# Altium PCB pcb-initial-failure.PcbDoc
Units mm, origin at the board's own origin, x right, y up, seen from the top; angles counter-clockwise.
Board outline 19.6 x 17.6 mm, 2 copper layers (F.Cu, B.Cu); 2 components, 9 nets, 95 pads, 15 vias.
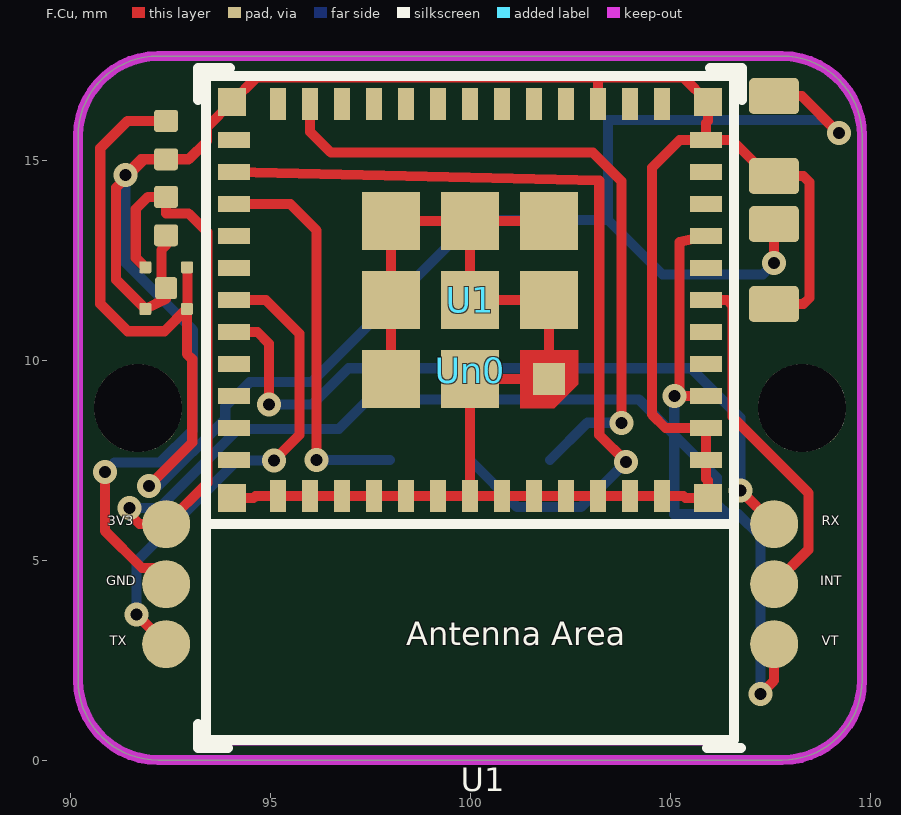
[diagram p0: F.Cu view]
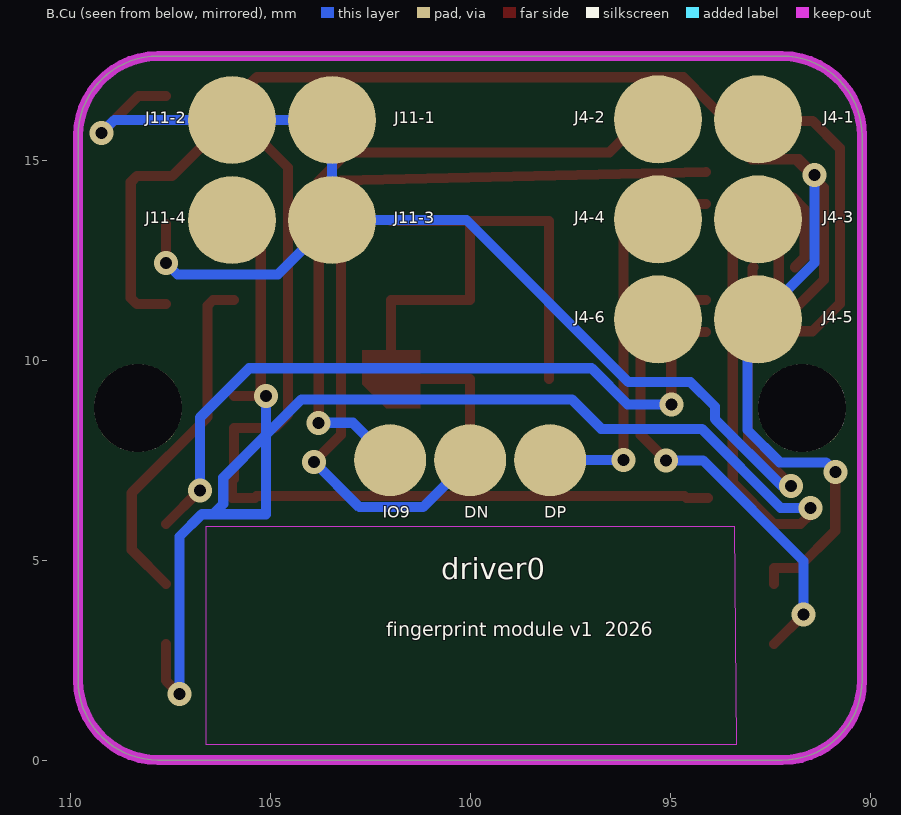
[diagram p1: B.Cu view, seen from below]

## Layer stack, top to bottom
F.Mask: solder mask 0.0102, Solder Resist, Dk 3.5
F.Cu: signal copper 0.0356
Dielectric 1: dielectric 0.32, FR-4, Dk 4.8
B.Cu: signal copper 0.0356
B.Mask: solder mask 0.0102, Solder Resist, Dk 3.5

## Board outline
92.2,17.6 107.8,17.6 cw(c107.799,15.599) 109.8,15.6 109.8,2 cw(c107.799,2.001) 107.8,0 92.2,0 cw(c92.201,2.001) 90.2,2 90.2,15.6 cw(c92.201,15.599) 92.2,17.6

## Design rules (kind name [scope] priority, off if disabled: settings)
Clearance "Clearence 0.2_NetClass" [InNetClass('Default')] p1: gap=0.127 ignorepadtopadclearanceinfootprint=FALSE
MinimumSolderMaskSliver [All] p1: minsoldermaskwidth=0
PolygonConnect [All] p1: connectstyle=Direct reliefconductorwidth=0.254 reliefentries=4 polygonreliefangle="90 Angle" airgapwidth=0.254
RoutingVias [All] p1: holewidth=0.3 width=0.6 viastyle="Through Hole" minholewidth=0.3 minwidth=0.5 maxholewidth=0.4 maxwidth=0.8
SilkToSilkClearance [All] p1: silktosilkclearance=0
SilkToSolderMaskClearance [IsPad] p1: minsilkscreentomaskgap=0 clearancetoexposedcopper=TRUE
SolderMaskExpansion [All] p1: expansion=0 istentingtop=FALSE
Width Width_Power [InNet('VBAT') Or InNet('GND') Or InNet('+3V3')] p1: maxlimit=0.6 minlimit=0.254 preferedwidth=0.254 minimp=50.000000 maximp=50.000000 favimp=50.000000
Width [All] p2: maxlimit=0.254 minlimit=0.254 preferedwidth=0.254
27 further rules are at their usual default settings.

## Classes and differential pairs
net class Default: +3V3 BOOT_IO9 FP_INT FP_RX FP_TX GND USB_DN USB_DP VBAT

## Components (designator, comment, footprint, x,y, rotation, side; value= is the part's Value field where it differs from the comment)
U1 "ESP32-C3-MINI-1" ESP32-C3-MINI-1 100,8.8 r180 top
Un0 "Comment" touchid_board 100,8.8 r0 top value=touchid_v1

## Footprints (in the part's own frame and the unit in brackets; to place one, negate y for a bottom-side part, rotate by r counter-clockwise, add the part's x,y. Pads: shape width x height; smd on the part's side, far side on the other; paste and mask are expansions set on the pad)
ESP32-C3-MINI-1 [mm]
  rect 0.8x0.4 smd mask+0: 1(-5.9,1.3) 2(-5.9,0.5) 3(-5.9,-0.3) 4(-5.9,-1.1) 5(-5.9,-1.9) 6(-5.9,-2.7) 7(-5.9,-3.5) 8(-5.9,-4.3) 9(-5.9,-5.1) 10(-5.9,-5.9) 11(-5.9,-6.7) 25(5.9,-6.7) 26(5.9,-5.9) 27(5.9,-5.1) 28(5.9,-4.3) 29(5.9,-3.5) 30(5.9,-2.7) 31(5.9,-1.9) 32(5.9,-1.1) 33(5.9,-0.3) 34(5.9,0.5) 35(5.9,1.3)
  rect 0.4x0.8 smd mask+0: 12(-4.8,-7.6) 13(-4,-7.6) 14(-3.2,-7.6) 15(-2.4,-7.6) 16(-1.6,-7.6) 17(-0.8,-7.6) 18(0,-7.6) 19(0.8,-7.6) 20(1.6,-7.6) 21(2.4,-7.6) 22(3.2,-7.6) 23(4,-7.6) 24(4.8,-7.6) 36(4.8,2.2) 37(4,2.2) 38(3.2,2.2) 39(2.4,2.2) 40(1.6,2.2) 41(0.8,2.2) 42(0,2.2) 43(-0.8,2.2) 44(-1.6,2.2) 45(-2.4,2.2) 46(-3.2,2.2) 47(-4,2.2) 48(-4.8,2.2)
  rect 0.8x0.8 smd mask+0: 49(-1.975,-0.725)
  rect 1.45x1.45 smd mask+0: 49(-1.975,-2.7) 49(-1.975,-4.675) 49(0,-0.725) 49(0,-2.7) 49(0,-4.675) 49(1.975,-0.725) 49(1.975,-2.7) 49(1.975,-4.675)
  rect 0.7x0.7 smd mask+0: 50(5.95,2.25) 51(5.95,-7.65) 52(-5.95,-7.65) 53(-5.95,2.25)
  F.Cu region: -1.25,-1.45 -2.7,-1.45 -2.7,-0.6 -2.1,0 -1.25,0
  silkscreen extent -6.8,-8.5 6.8,8.5
touchid_board [mm]
  rrect25% 0.6x0.55 smd mask+0: C1-1(-7.6,5.28) C1-2(-7.6,4.32) C2-1(-7.6,7.18) C2-2(-7.6,6.22)
  rrect25% 1.25x0.9 smd mask+0: C3-1(7.6,4.6) C3-2(7.6,2.6) C4-1(7.6,7.8) C4-2(7.6,5.8)
  round 1.2 smd mask+0: J2-1(-7.6,-2.9) J2-2(-7.6,-4.4) J2-3(-7.6,-5.9) J2-4(7.6,-2.9) J2-5(7.6,-4.4) J2-6(7.6,-5.9)
  round 2.2 smd far side paste-2.2 mask+0: J4-1(-7.2,7.22) J4-2(-4.7,7.22) J4-3(-7.2,4.72) J4-4(-4.7,4.72) J4-5(-7.2,2.22) J4-6(-4.7,2.22) J11-1(3.45,7.2) J11-2(5.95,7.2) J11-3(3.45,4.7) J11-4(5.95,4.7)
  round 1.8 smd far side paste-1.8 mask+0: TP-DN(0,-1.3) TP-DP(-2,-1.3) TP-IO9(2,-1.3)
  rrect25% 0.3x0.3 smd mask+0: U2-1(-8.12,3.52) U2-2(-8.12,2.48) U2-3(-7.08,2.48) U2-4(-7.08,3.52)
  rrect25% 0.55x0.55 smd mask+0: U2-5(-7.6,3)
  round 2.2 hole 2.2 paste-2539.97 mask+0: Un1(8.3,0) Un2(-8.3,0)

## Part data
U1: "ESP32-C3-MINI-1: https://www.espressif.com/sites/default/files/documentation/esp32-c3-mini-1_datasheet_en.pdf"
Un0: library part touchid_board, "TouchID module board: F.Cu=components (cavity side), B.Cu=pogo pads (module bottom). Nets: VBAT from J11-1/2/3, GND J4-5, 3V3 via U2 LDO. Ratsnest shows required connections - routing TBD."

## Via types
v1: diameter 0.6, hole 0.3, F.Cu to B.Cu, 15 vias

## Nets (pads, with @x,y where several pads share a name; then routed paths per layer and width w, separated by ;. In a path a pad name is that pad's centre, name@x,y a point inside that pad or via, vN(x,y) a via of type N, cw(c..) or ccw(c..) an arc to the next point about the centre after c; other vN are vias at no path point)
+3V3: U1.3 U1.8 Un0.C1-1 Un0.J2-1 Un0.J2-6 Un0.U2-1 | length 46.6
  F.Cu w0.254: v1(91.491,6.304) 91.491,6.147 91.738,5.9 Un0.J2-1 93.435,6.935 93.435,13.194 92.964,13.665 92.4,13.665 Un0.C1-1 91.948,14.08 91.643,13.775 91.643,12.557 Un0.U2-1 ; v1(105.105,9.1) v1@105.232,9.1 ; U1.3 v1@105.232,9.1 ; U1.8 105.232,12.954 v1@105.232,9.1 ; v1(107.264,1.651) 107.6,1.987 Un0.J2-6
  B.Cu w0.254: v1(91.491,6.304) 92.232,6.304 94.209,8.28 96.723,8.28 97.46,9.017 104.216,9.017 105.105,8.128 ; v1(105.105,9.1) 105.105,8.128 ; v1(107.264,1.651) 107.264,5.588 106.705,6.147 106.426,6.147 ; 105.105,8.128 105.105,6.147 106.426,6.147 ; 105.105,8.128 106.172,7.061 106.172,6.401 106.426,6.147
BOOT_IO9: U1.23 Un0.TP-IO9 | length 17.2
  F.Cu w0.254: U1.23 96,15.709 96.52,15.189 103.066,15.189 103.784,14.47 v1(103.784,8.433)
  B.Cu w0.254: Un0.TP-IO9 102.933,8.433 v1(103.784,8.433)
FP_INT: U1.6 Un0.J2-5 | length 8.8
  F.Cu w0.254: U1.6 106.426,11.5 106.565,11.361 106.565,8.573 108.458,6.68 108.458,5.258 Un0.J2-5
FP_RX: U1.31 Un0.J2-4 | length 18.2
  F.Cu w0.254: U1.31 94.685,10.7 94.971,10.414 v1(94.971,8.89) ; v1(106.756,6.744) Un0.J2-4
  B.Cu w0.254: v1(94.971,8.89) 96.057,8.89 96.962,9.794 105.522,9.794 106.756,8.56 v1(106.756,6.744)
FP_TX: U1.30 Un0.J2-3 | length 12.3
  F.Cu w0.254: v1(91.664,3.636) Un0.J2-3 ; U1.30 94.894,11.5 95.737,10.657 95.737,8.133 v1(95.098,7.493)
  B.Cu w0.254: v1(91.664,3.636) 91.664,4.978 94.178,7.493 v1(95.098,7.493)
GND: U1.1 U1.2 U1.11 U1.14 U1.36 U1.37 U1.38 U1.39 U1.40 U1.41 U1.42 U1.43 U1.44 U1.45 U1.46 U1.47 U1.48 U1.49 U1.50 U1.51 U1.52 U1.53 Un0.C1-2 Un0.C2-2 Un0.C3-2 Un0.C4-2 Un0.J2-2 Un0.J4-5 Un0.U2-2 Un0.U2-5 | length 86.4
  F.Cu w0.254: v1(90.87,7.202) 90.87,5.731 91.8,4.801 92.4,4.801 Un0.J2-2 ; v1(91.389,14.63) 91.779,15.02 91.855,15.02 ; Un0.C1-2 92.4,12.871 92.284,12.755 92.284,11.916 Un0.U2-5 92.4,11.532 Un0.U2-2 91.703,11.457 91.151,12.009 91.151,14.316 91.427,14.592 91.855,15.02 ; U1.50 94.59,6.55 94.64,6.6 U1.36 U1.37 U1.38 U1.39 U1.40 U1.41 U1.42 ; U1.49@98.025,9.525 98.025,11.5 98.025,13.475 U1.49@100,13.475 ; U1.49@101.975,13.475 U1.49@100,13.475 ; U1.14 103.2,17.069 ; Un0.C3-2 108.331,11.4 108.483,11.552 108.483,14.448 108.331,14.6 Un0.C4-2 107.448,14.6 106.548,15.5 U1.11 ; 91.855,15.02 Un0.C2-2 92.964,15.02 93.421,15.477 93.421,15.821 U1.51 94.669,17.069 103.2,17.069 ; U1.42 U1.43 U1.44 U1.45 U1.46 U1.47 U1.48 105.334,6.6 105.384,6.55 U1.53 105.95,6.985 105.9,7.035 U1.1 U1.2 104.887,8.3 104.551,8.636 104.551,14.813 105.238,15.5 U1.11 ; U1.42 100,9.525 101.975,9.525 101.975,11.5 100,11.5 U1.49@100,13.475 ; 103.2,17.069 105.331,17.069 U1.52 105.95,15.976 105.9,15.926 U1.11
  B.Cu w0.254: v1(90.87,7.202) 91.11,7.442 92.257,7.442 93.066,8.251 93.066,10.754 Un0.J4-5 91.389,12.431 v1(91.389,14.63)
USB_DN: U1.26 Un0.TP-DN | length 21.3
  F.Cu w0.254: U1.26 103.23,14.486 103.23,8.128 v1(103.901,7.457)
  B.Cu w0.254: Un0.TP-DN 101.175,6.325 102.768,6.325 v1(103.901,7.457)
USB_DP: U1.27 Un0.TP-DP | length 9.9
  F.Cu w0.254: U1.27 95.504,13.9 96.164,13.24 v1(96.164,7.5)
  B.Cu w0.254: v1(96.164,7.5) Un0.TP-DP
VBAT: Un0.C2-1 Un0.C3-1 Un0.C4-1 Un0.J11-1 Un0.J11-2 Un0.J11-3 Un0.U2-3 Un0.U2-4 | length 45.1
  F.Cu w0.254: v1(91.973,6.858) 93.054,7.939 93.054,10.019 92.92,10.153 Un0.U2-3 ; Un0.C2-1 91.44,15.98 90.754,15.294 90.754,11.405 91.44,10.719 92.359,10.719 Un0.U2-3 ; Un0.U2-4 92.939,12.301 92.939,11.299 Un0.U2-3 ; v1(107.6,12.426) Un0.C3-1 ; Un0.C4-1 108.292,16.6 v1(109.22,15.672)
  B.Cu w0.254: v1(91.973,6.858) 92.212,6.858 93.878,8.525 93.878,8.839 94.488,9.449 96.037,9.449 100.089,13.5 Un0.J11-3 ; v1(107.6,12.426) 107.315,12.141 104.809,12.141 Un0.J11-3 ; v1(109.22,15.672) 108.892,16 Un0.J11-2 Un0.J11-1 Un0.J11-3
pads on no net: U1.4 U1.5 U1.7 U1.9 U1.10 U1.12 U1.13 U1.15 U1.16 U1.17 U1.18 U1.19 U1.20 U1.21 U1.22 U1.24 U1.25 U1.28 U1.29 U1.32 U1.33 U1.34 U1.35 Un0.J4-1 Un0.J4-2 Un0.J4-3 Un0.J4-4 Un0.J4-6 Un0.J11-4 Un0.Un1 Un0.Un2

## Keep-outs
F.Cu:
  region: 93.345,0.381 106.6,0.381 106.6,5.85 93.4,5.85
B.Cu:
  region: 93.345,0.381 106.6,0.381 106.6,5.85 93.4,5.85
Edge.Cuts:
  lines w0: 90.2,2 ccw(c92.201,2.001) 92.2,0 107.8,0 ccw(c107.799,2.001) 109.8,2 109.8,15.6 ccw(c107.799,15.599) 107.8,17.6 92.2,17.6 ccw(c92.201,15.599) 90.2,15.6 90.2,2
  lines w0.254: 90.2,2 ccw(c92.201,2.001) 92.2,0 107.8,0 ccw(c107.799,2.001) 109.8,2 109.8,15.6 ccw(c107.799,15.599) 107.8,17.6 92.2,17.6 ccw(c92.201,15.599) 90.2,15.6 90.2,2

## Text inside footprints (layer, text, board x,y; h text height)
U1: F.SilkS "Antenna Area" at 98.401,2.666 h1
Un0: B.SilkS "fingerprint module v1  2026" at 102.096,2.971 h0.6; B.SilkS "driver0" at 100.725,4.343 h0.9; B.SilkS "IO9" at 102.186,5.958 h0.5; B.SilkS "DN" at 100.149,5.961 h0.5; B.SilkS "DP" at 98.149,5.961 h0.5; B.SilkS "J11-3" at 101.913,13.318 h0.5; B.SilkS "J11-4" at 108.119,13.318 h0.5; B.SilkS "J11-1" at 101.898,15.82 h0.5; B.SilkS "J11-2" at 108.116,15.818 h0.5; B.SilkS "J4-5" at 91.19,10.838 h0.5; B.SilkS "J4-6" at 97.394,10.838 h0.5; B.SilkS "J4-3" at 91.187,13.338 h0.5; B.SilkS "J4-4" at 97.393,13.338 h0.5; B.SilkS "J4-1" at 91.173,15.838 h0.5; B.SilkS "J4-2" at 97.391,15.838 h0.5; F.Fab "J2 sensor wires" at 91.769,1.336 h0.45; F.Fab "VT" at 105.998,2.787 h0.4; F.Fab "INT" at 105.957,4.289 h0.4; F.Fab "RX" at 105.992,5.789 h0.4; F.Fab "TX" at 93.792,2.789 h0.4; F.Fab "GND" at 93.704,4.286 h0.4; F.Fab "3V3" at 93.744,5.786 h0.4; F.Fab "C4" at 105.883,15.472 h0.45; F.Fab "C3" at 105.888,12.271 h0.45; F.Fab "C2" at 93.598,15.386 h0.4; F.Fab "C1" at 93.613,13.486 h0.4; F.Fab "U2 TPS7A20" at 93.659,11.671 h0.45; F.SilkS "VT" at 108.798,2.787 h0.4; F.SilkS "INT" at 108.757,4.289 h0.4; F.SilkS "RX" at 108.792,5.789 h0.4; F.SilkS "TX" at 90.992,2.789 h0.4; F.SilkS "GND" at 90.904,4.286 h0.4; F.SilkS "3V3" at 90.944,5.786 h0.4